# Altium PCB MAGIsDebugger.PcbDoc (part 1 of 2)
Units mil, origin at the board's own origin, x right, y up, seen from the top; angles counter-clockwise.
Board outline 6000 x 4000 mil, 2 copper layers (Top Layer, Bottom Layer); 31 components, 29 nets, 170 pads, 25 vias.
Unrouted connection lines stored in the file: 4.
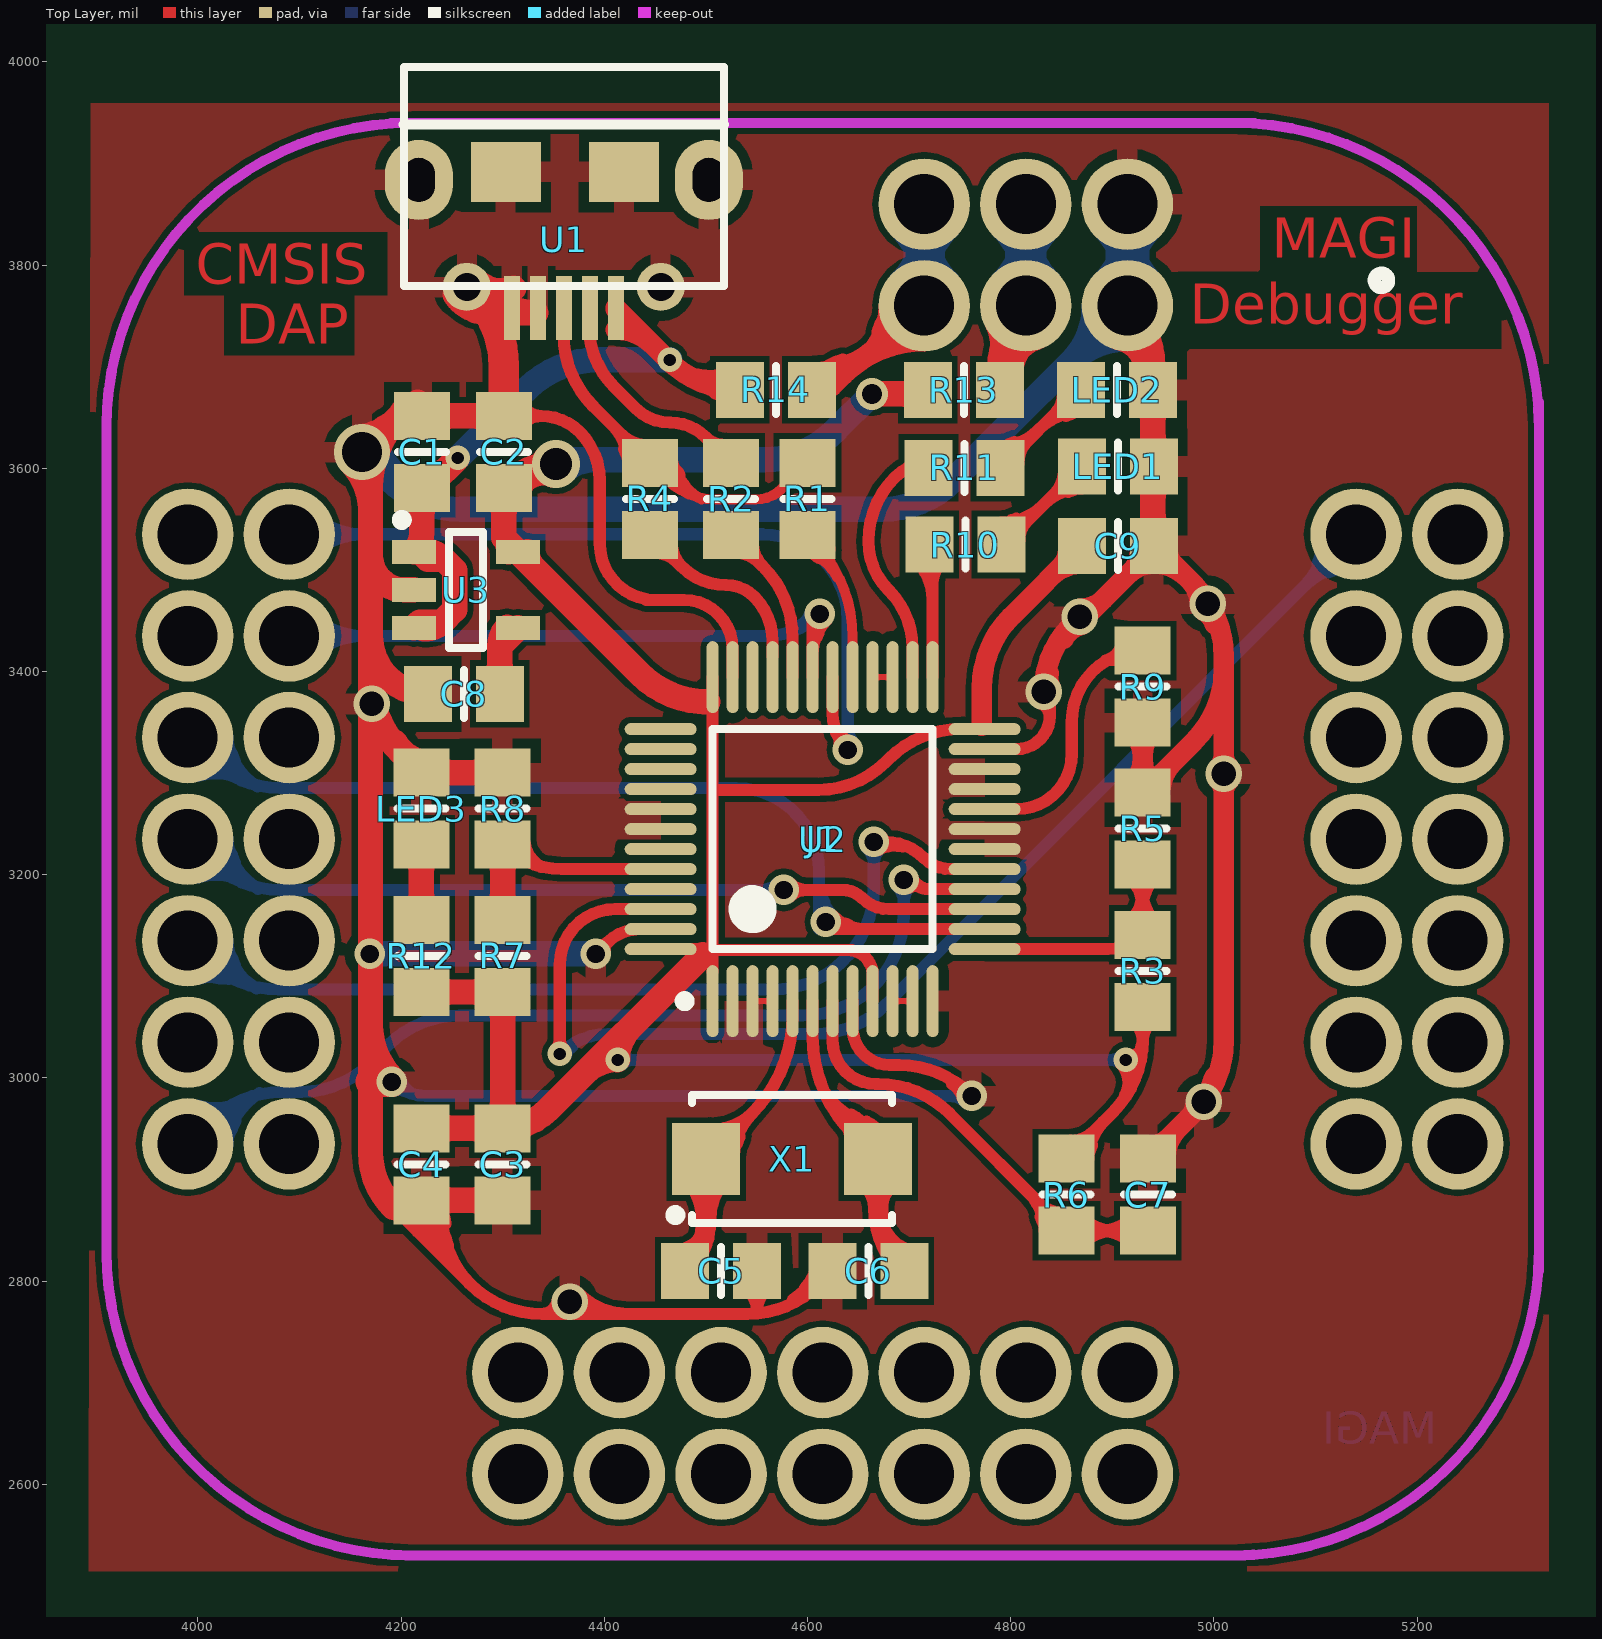
[diagram p0: Top Layer view]
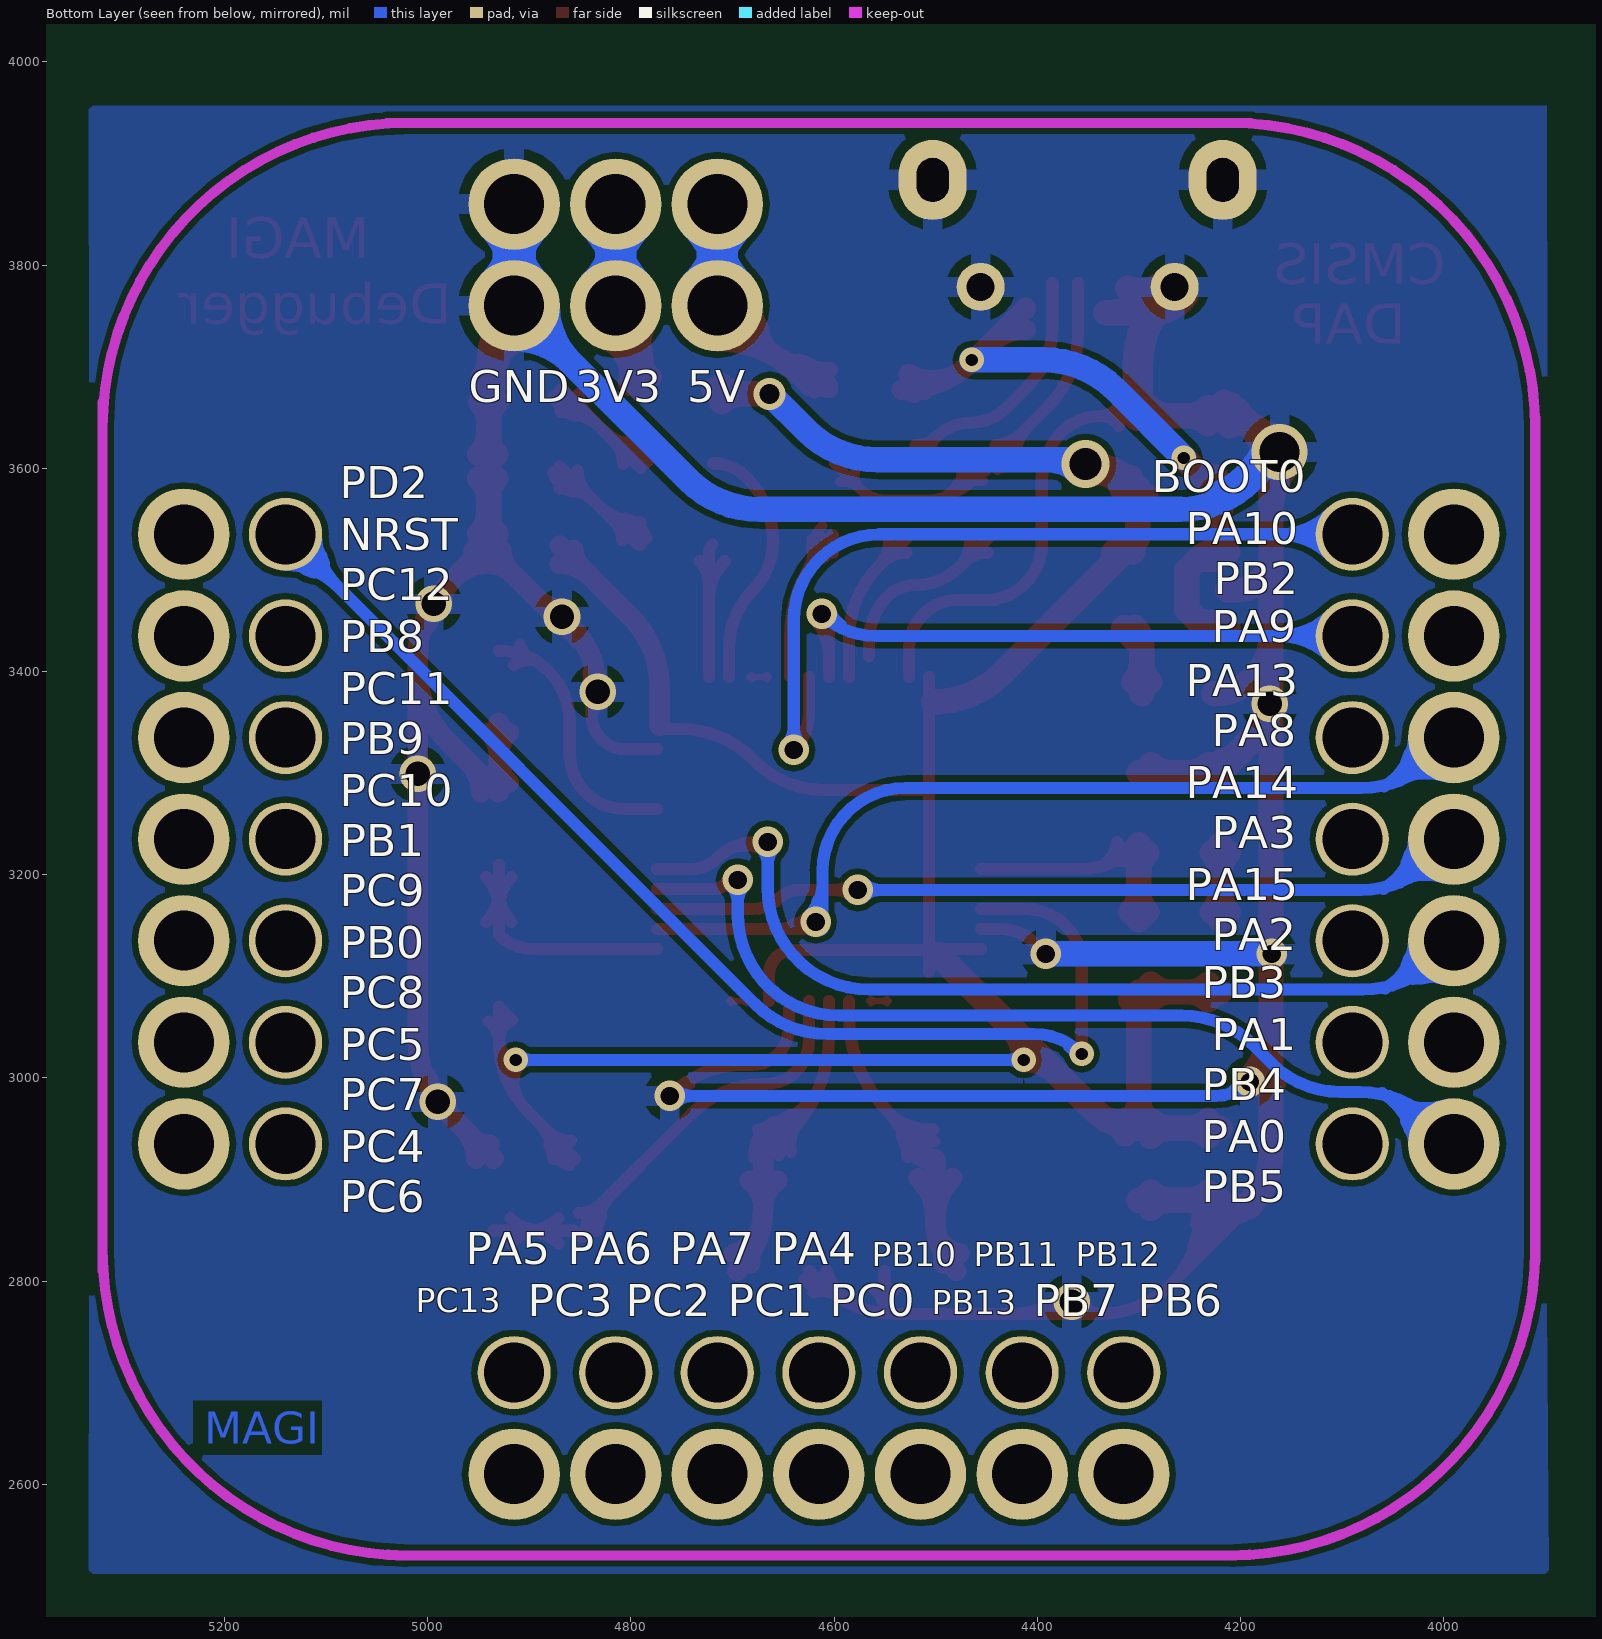
[diagram p1: Bottom Layer view, seen from below]

## Layer stack, top to bottom
Top Solder: solder mask 0.4, Solder Resist, Dk 3.5
Top Layer: signal copper 1.4
Dielectric 1: dielectric 12.6, FR-4, Dk 4.8
Bottom Layer: signal copper 1.4
Bottom Solder: solder mask 0.4, Solder Resist, Dk 3.5

## Board outline
1000,1000 7000,1000 7000,5000 1000,5000

## Design rules (kind name [scope] priority, off if disabled: settings)
Clearance [All] p1: gap=6
ComponentClearance [InNet('No Net') vs InNet('3.3V')] p1: gap=10 collisioncheckmode=3 verticalgap=10 showdistances=FALSE
PolygonConnect [All] p1: connectstyle=Relief reliefconductorwidth=20 reliefentries=4 polygonreliefangle="90 Angle" airgapwidth=10
RoutingVias [All] p1: holewidth=28 width=50 viastyle="Through Hole" minholewidth=12 minwidth=24 maxholewidth=280 maxwidth=500
SolderMaskExpansion [All] p1: expansion=4
Width [All] p1: maxlimit=100 minlimit=6 preferedwidth=10
28 further rules are at their usual default settings.

## Components (designator, comment, footprint, x,y, rotation, side; value= is the part's Value field where it differs from the comment)
C1 "10uf" 6-0805_n 4220.47,3616.14 r90 top
C2 "10uf" 6-0805_n 4301.18,3616.14 r90 top
C3 "10uf" 6-0805_n 4300,2915 r270 top
C4 "10uf" 6-0805_N 4220,2915 r270 top
C5 "15PF" 6-0805_n 4515,2810 r180 top
C6 "15PF" 6-0805_n 4660,2810 r0 top
C7 "104" 6-0805_n 4935,2885 r270 top
C8 "10uf" 6-0805_n 4261.81,3377.95 r180 top
C9 "10uf" 6-0805_N 4905.51,3523.62 r0 top
J1 "MAGIsBoard-Python" MAGIsBoard-Python 4615,3235 r0 top
LED1 "LED_3" 6-0805_n 4905.51,3601.77 r0 top
LED2 "LED_3" 6-0805_n 4904.65,3677.17 r0 top
LED3 "LED_3" 6-0805_n 4220,3265 r90 top
R1 "10K" 6-0805_n 4600,3570 r270 top
R2 "10K" 6-0805_n 4525,3570 r270 top
R3 "10K" 6-0805_n 4930,3105.43 r270 top
R4 "10K" 6-0805_n 4445,3570 r270 top
R5 "10K" 6-0805_n 4930,3245.43 r270 top
R6 "10K" 6-0805_n 4855,2885 r90 top
R7 "10K" 6-0805_n 4300,3120 r270 top
R8 "10K" 6-0805_n 4300,3265 r270 top
R9 "10K" 6-0805_n 4930,3385 r90 top
R10 "RES1_1" 6-0805_n 4755.43,3525 r180 top
R11 "RES1_1" 6-0805_n 4754.57,3600.39 r180 top
R12 "RES1_1" 6-0805_n 4220,3120 r270 top
R13 "0" 6-0805_n 4753.94,3677.17 r0 top
R14 "0" 6-0805_n 4568.9,3677.17 r0 top
U1 "USB" MicroUSB-B 4360.24,3850.39 r0 top
U2 "STM32F103CBT6" LQFP48_N 4615,3235 r90 top
U3 "RT9193" RT9193 4263.78,3480.32 r0 top
X1 "8M" 5032 4595,2920 r270 top

## Footprints (in the part's own frame and the unit in brackets; to place one, negate y for a bottom-side part, rotate by r counter-clockwise, add the part's x,y. Pads: shape width x height; smd on the part's side, far side on the other; paste and mask are expansions set on the pad)
6-0805_n [mm] "Chip Resistor, Body 2.0x1.2mm, IPC Medium Density"
  rect 1.2x1.4 smd: 1(-0.9,0) 2(0.9,0)
  silkscreen extent 0,-0.6 0,0.6, body extent -1.07,-0.7 1.07,0.7, height 0.7
6-0805_N [mm] "Chip Resistor, Body 2.0x1.2mm, IPC Medium Density"
  rect 1.2x1.4 smd: 1(-0.9,0) 2(0.9,0)
  silkscreen extent 0,-0.6 0,0.6, body extent -1.07,-0.7 1.07,0.7, height 0.7
5032 [mm]
  rect 1.8x1.7 smd: 1(0,-2.404) 2(0,1.896)
  silkscreen extent -1.6,-3.3 1.6,2.25
LQFP48_N [mm] "Thin QFP, 48-Leads, Body 7x7mm, Pitch 0.5mm, IPC Medium Density"
  oval 1.8x0.3 smd: 1(-4.05,2.75) 2(-4.05,2.25) 3(-4.05,1.75) 4(-4.05,1.25) 5(-4.05,0.75) 6(-4.05,0.25) 7(-4.05,-0.25) 8(-4.05,-0.75) 9(-4.05,-1.25) 10(-4.05,-1.75) 11(-4.05,-2.25) 12(-4.05,-2.75) 25(4.05,-2.75) 26(4.05,-2.25) 27(4.05,-1.75) 28(4.05,-1.25) 29(4.05,-0.75) 30(4.05,-0.25) 31(4.05,0.25) 32(4.05,0.75) 33(4.05,1.25) 34(4.05,1.75) 35(4.05,2.25) 36(4.05,2.75)
  oval 0.3x1.8 smd: 13(-2.75,-4.05) 14(-2.25,-4.05) 15(-1.75,-4.05) 16(-1.25,-4.05) 17(-0.75,-4.05) 18(-0.25,-4.05) 19(0.25,-4.05) 20(0.75,-4.05) 21(1.25,-4.05) 22(1.75,-4.05) 23(2.25,-4.05) 24(2.75,-4.05) 37(2.75,4.05) 38(2.25,4.05) 39(1.75,4.05) 40(1.25,4.05) 41(0.75,4.05) 42(0.25,4.05) 43(-0.25,4.05) 44(-0.75,4.05) 45(-1.25,4.05) 46(-1.75,4.05) 47(-2.25,4.05) 48(-2.75,4.05)
  silkscreen extent -4.17,-2.75 2.75,3.57, body extent -3.5,-3.5 3.5,3.5, height 1.6
MAGIsBoard-Python [mil]
  round 90 hole 59.06: 1(300,525) 1(300,625) 2(200,525) 2(200,625) 3(100,525) 3(100,625) 29(-625,300) 30(-625,200) 31(-625,100) 32(-625,0) 33(-625,-100) 34(-625,-200) 35(-625,-300) 36(-300,-625) 37(-200,-625) 38(-100,-625) 39(0,-625) 40(100,-625) 41(200,-625) 42(300,-625) 43(625,-300) 44(625,-200) 45(625,-100) 46(625,0) 47(625,100) 48(625,200) 49(625,300)
  round 90 / inner round 72 / far side round 72 hole 59.06: 8(-525,300) 9(-525,200) 10(-525,100) 11(-525,0) 12(-525,-100) 13(-525,-200) 14(-525,-300) 15(-300,-525) 16(-200,-525) 17(-100,-525) 18(0,-525) 19(100,-525) 20(200,-525) 21(300,-525) 22(525,-300) 23(525,-200) 24(525,-100) 25(525,0) 26(525,100) 27(525,200) 28(525,300)
  Keep-Out Layer lines w10: -705,-415 -705,415 ; -705,-405 ccw(c-405,-405) -405,-705 ; -705,405 cw(c-405,405) -405,705 ; -425,705 425,705 ; -410,-705 415,-705 ; 405,-705 ccw(c405,-405) 705,-405 ; 405,705 cw(c405,405) 705,405 ; 705,-425 705,430
  silkscreen extent 543,543 557,557
MicroUSB-B [mm]
  oval 1.7x2 hole 0.8 slot 1.1 at 90 deg: 0(-3.625,0.85) 0(3.625,0.85)
  oval 1.7x2 on Top Paste: 0(-3.625,0.85) 0(3.625,0.85)
  round 1.2 hole 0.7: 0(-2.425,-1.825) 0(2.425,-1.825)
  round 1.2 on Top Paste: 0(-2.425,-1.825) 0(2.425,-1.825)
  rect 1.75x1.5 smd: 0(-1.45,1.05) 0(1.5,1.05)
  rect 0.4x1.6 smd: 1(1.3,-2.35) 2(0.65,-2.35) 3(0,-2.35) 4(-0.65,-2.35) 5(-1.3,-2.35)
  silkscreen extent -4,-1.8 4,3.67, body extent -4.1,-1.93 4.1,3.77, height 3
RT9193 [mm]
  rect 1.1x0.6 smd: 1(-1.3,0.95) 2(-1.3,0) 3(-1.3,-0.95) 4(1.3,-0.95) 5(1.3,0.95)
  silkscreen extent -1.72,-1.45 0.43,1.87

## Part data
C1 C2 C3 C4 C8 C9: library part "CAPACITOR POL", "Capacitor"
C5 C6 C7: library part CAP
R1 R2 R3 R4 R5 R6 R7 R8 R9 R13 R14: library part RES
U2: "STM32 ARM-based 32-bit MCU with 128 Kbytes Flash, 48-pin LQFP, Industrial Temperature"
X1: library part CRYSTAL

## Via types
v1: diameter 30, hole 18, Top Layer to Bottom Layer, tented both sides, 10 vias
v2: diameter 36, hole 24, Top Layer to Bottom Layer, tented both sides, 7 vias
v3: diameter 24, hole 12, Top Layer to Bottom Layer, tented both sides, 5 vias
v4: diameter 47.24, hole 31.5, Top Layer to Bottom Layer, tented both sides, 1 vias
v5: diameter 55.12, hole 39.37, Top Layer to Bottom Layer, tented both sides, 1 vias
v6: diameter 31.5, hole 19.68, Top Layer to Bottom Layer, tented both sides, 1 vias

## Nets (pads, with @x,y where several pads share a name; then routed paths per layer and width w, separated by ;. In a path a pad name is that pad's centre, name@x,y a point inside that pad or via, vN(x,y) a via of type N, cw(c..) or ccw(c..) an arc to the next point about the centre after c; other vN are vias at no path point)
3.3V: C2.1 C3.1 C4.1 C9.1 R3.2 R6.2 R7.2 R12.2 R13.1 U2.1 U2.9 U2.24 U2.36 U2.48 U3.5 | length 5162.2
  Top Layer w12: U2.48@4455.55,3126.73 4506.73,3126.73 ; U2.1@4506.73,3104.33 4506.73,3125.98 4507.48,3125.98 ; U2.36@4506.73,3394.45 4506.73,3283.46 ; U2.9@4664.21,3075.55 4664.21,3101.54 ccw(c4639.76,3101.54) 4639.76,3125.98 4507.48,3125.98 ; U2.24@4774.45,3343.27 4750.83,3343.27 ccw(c4750.83,3243.27) 4680.12,3313.98 4677.17,3311.02 cw(c4610.63,3377.56) 4610.63,3283.46 4506.73,3283.46 ; R6.2@4855,2920.43 4900.71,2966.14 ccw(c4830,3036.85) 4930,3036.85 ; R6.2@4860.67,2914.3 ccw(c4853,2941.42) R6.2@4880.23,2934.12 ; v3@4915.61,3023.29 ccw(c4919.59,3033.24) 4927.93,3026.51 ; R3.2@4916.85,3056.85 R3.2@4930,3070 4930,3036.85 ; 4506.73,3126.73 ccw(c4507.48,3126.73) 4507.48,3125.98 ; 4506.73,3126.73 4506.73,3283.46 ; 4930,3036.86 cw(c4952.36,3036.86) 4939.85,3055.39 ccw(c4952.36,3036.86) 4930,3036.86 ; 4930,3036.86 ccw(c4907.64,3036.86) 4920.15,3055.39 cw(c4907.64,3036.86) 4930,3036.86 ; R6.2@4858.94,2938.06 ccw(c4858.94,2971.09) 4882.3,2947.73 cw(c4858.94,2971.09) R6.2@4858.94,2938.06 ; R6.2@4876.56,2920.43 cw(c4928.61,2920.43) 4891.8,2957.24 ccw(c4928.61,2920.43) R6.2@4876.56,2920.43 ; v3@4908.97,3013.65 cw(c4889.54,2995.77) 4912.78,2983.23 ccw(c4889.54,2995.77) v3@4908.97,3013.65 ; v3@4915.35,3012.05 ccw(c4908.77,3031) 4928.6,3027.9 cw(c4908.77,3031) v3@4915.35,3012.05 ; v3@4916.92,3012.87 ccw(c4898.4,3038.27) 4929.46,3033.41 cw(c4898.4,3038.27) v3@4916.92,3012.87 ; v3@4917.8,3021.78 cw(c4902.64,3007.83) 4920.77,2998.05 ccw(c4902.64,3007.83) v3@4917.8,3021.78
  Top Layer w20: U2.24@4771.65,3346.46 4771.65,3383.78 cw(c4871.65,3383.78) 4800.94,3454.49 C9.1@4870.08,3523.62 ; 4840.1,3493.65 cw(c4870.08,3463.67) 4870.08,3506.06 ccw(c4870.08,3463.67) 4840.1,3493.65 ; C9.1@4849.61,3503.15 ccw(c4833.08,3519.69) 4856.46,3519.69 cw(c4833.08,3519.69) C9.1@4849.61,3503.15
  Top Layer w25: C4.1@4220,2950.43 C3.1@4300,2950.43 ; R12.2@4220,3084.57 R7.2@4300,3084.57 C3.1@4300,2950.43 ; C2.1@4308.4,3591.34 ccw(c4316.95,3619.01) v4@4331.43,3593.93 ; C2.1@4315.94,3578.13 cw(c4340.32,3572.31) v4@4340.32,3597.38 ; C2.1@4316.82,3590.01 ccw(c4305.78,3631.22) v4@4342.73,3609.89 ; C2.1@4319.84,3587.42 cw(c4339.3,3567.96) v4@4348.6,3593.86 ; C2.1@4321.77,3592.41 ccw(c4313.38,3623.72) v4@4342.4,3609.28 ; v4@4334.39,3601.98 ccw(c4354.28,3567.54) C2.1@4315.86,3577.83 ; v4(4352.36,3604.33) ccw(c4352.36,3537.8) 4305.32,3584.84 C2.1@4301.18,3580.71 4301.18,3531.5 ; 4497.05,3121.06 4345.1,2969.11 cw(c4300,3014.21) C3.1@4300,2950.43 ; U2.36@4502.01,3370.08 cw(c4502.01,3465.23) 4493.73,3370.44 cw(c4502.01,3465.23) 4434.73,3397.95 U3.5@4314.96,3517.72 4301.18,3531.5 ; v6(4663.39,3673.23) 4709,3673.23 ccw(c4709,3686.67) R13.1@4718.5,3677.17 ; 4250.79,2950.43 cw(c4250.79,2977.28) 4231.8,2958.3 ccw(c4250.79,2977.28) 4250.79,2950.43 ; 4250.79,2950.43 ccw(c4250.79,2923.58) 4231.8,2942.57 cw(c4250.79,2923.58) 4250.79,2950.43 ; 4250.79,3084.57 cw(c4250.79,3111.42) 4231.8,3092.43 ccw(c4250.79,3111.42) 4250.79,3084.57 ; 4250.79,3084.57 ccw(c4250.79,3057.72) 4231.8,3076.7 cw(c4250.79,3057.72) 4250.79,3084.57 ; 4269.21,2950.43 cw(c4269.21,2923.58) 4288.2,2942.57 ccw(c4269.21,2923.58) 4269.21,2950.43 ; 4269.21,2950.43 ccw(c4269.21,2977.28) 4288.2,2958.3 cw(c4269.21,2977.28) 4269.21,2950.43 ; 4269.21,3084.57 cw(c4269.21,3057.72) 4288.2,3076.7 ccw(c4269.21,3057.72) 4269.21,3084.57 ; 4269.21,3084.57 ccw(c4269.21,3111.42) 4288.2,3092.43 cw(c4269.21,3111.42) 4269.21,3084.57 ; 4300,2977.28 cw(c4273.15,2977.28) 4292.14,2958.3 ccw(c4273.15,2977.28) 4300,2977.28 ; 4300,2977.28 ccw(c4326.85,2977.28) 4307.86,2958.3 cw(c4326.85,2977.28) 4300,2977.28 ; 4300,3057.72 cw(c4326.85,3057.72) 4307.86,3076.7 ccw(c4326.85,3057.72) 4300,3057.72 ; 4300,3057.72 ccw(c4273.15,3057.72) 4292.14,3076.7 cw(c4273.15,3057.72) 4300,3057.72 ; 4301.18,3531.5 cw(c4289.63,3519.94) 4305.8,3517.62 ccw(c4289.63,3519.94) 4301.18,3531.5 ; 4301.18,3553.86 cw(c4328.03,3553.86) 4309.05,3572.84 ccw(c4328.03,3553.86) 4301.18,3553.86 ; 4301.18,3553.86 ccw(c4274.33,3553.86) 4293.32,3572.84 cw(c4274.33,3553.86) 4301.18,3553.86 ; C2.1@4315.86,3577.83 cw(c4353.28,3567.8) 4333.91,3601.35 ccw(c4353.28,3567.8) C2.1@4315.86,3577.83 ; C2.1@4319.73,3587.17 cw(c4339.53,3567.38) v4@4348.71,3593.82 ; C2.1@4319.73,3587.17 cw(c4339.53,3567.38) v4@4348.71,3593.82 ; C2.1@4319.73,3587.17 cw(c4339.53,3567.38) v4@4348.71,3593.82 ; C2.1@4326.43,3597.38 cw(c4333.38,3571.45) 4346.8,3594.7 ccw(c4333.38,3571.45) C2.1@4326.43,3597.38 ; C2.1@4326.43,3597.38 ccw(c4319.48,3623.32) v4@4342.73,3609.89 ; C2.1@4326.43,3597.38 ccw(c4319.48,3623.32) v4@4342.73,3609.89 ; 4691.65,3673.23 cw(c4691.65,3646.38) 4710.64,3665.36 ccw(c4691.65,3646.38) 4691.65,3673.23 ; 4691.65,3673.23 ccw(c4691.65,3700.08) 4710.64,3681.09 cw(c4691.65,3700.08) 4691.65,3673.23 ; C3.1@4309.5,2960.06 ccw(c4321.18,2980.31) 4327.23,2957.73 cw(c4321.18,2980.31) C3.1@4309.5,2960.06 ; C3.1@4313.57,2944.87 cw(c4339.84,2929.71) 4331.99,2959 ccw(c4339.84,2929.71) C3.1@4313.57,2944.87 ; U3.5@4324.11,3517.72 ccw(c4346.21,3517.72) 4330.59,3502.09 cw(c4346.21,3517.72) U3.5@4324.11,3517.72 ; 4380.63,3004.65 cw(c4413.39,2971.9) 4413.39,3018.22 ccw(c4413.39,2971.9) 4380.63,3004.65 ; v3@4412.89,3017.72 cw(c4459.2,3017.72) 4426.45,3050.47 ccw(c4459.2,3017.72) v3@4412.89,3017.72
  Bottom Layer w12: v3(4413.39,3017.72) v3(4913.39,3017.72) ; 4427.87,3017.72 cw(c4427.87,3032.2) 4417.63,3021.96 ccw(c4427.87,3032.2) 4427.87,3017.72 ; 4427.87,3017.72 ccw(c4427.87,3003.23) 4417.63,3013.47 cw(c4427.87,3003.23) 4427.87,3017.72 ; 4898.9,3017.72 cw(c4898.9,3003.23) 4909.14,3013.47 ccw(c4898.9,3003.23) 4898.9,3017.72 ; 4898.9,3017.72 ccw(c4898.9,3032.2) 4909.14,3021.96 cw(c4898.9,3032.2) 4898.9,3017.72
  Bottom Layer w25: v4@4362.2,3608.27 4557,3608.27 ccw(c4557,3708.27) 4627.71,3637.56 v6(4663.39,3673.23) ; v4@4360.23,3596.47 cw(c4388.72,3567.98) 4388.72,3608.27 ccw(c4388.72,3567.98) v4@4360.23,3596.47
5V: C1.1 R14.1 U1.1 U3.1 U3.3 | length 1223.2
  Top Layer w20: U1.1@4411.42,3757.87 4462.89,3706.4 ccw(c4533.46,3776.97) R14.1@4533.46,3677.17 R14.1@4511.18,3677.17 ; U1.1@4411.42,3736.38 cw(c4411.42,3684.48) 4448.11,3721.18 ccw(c4411.42,3684.48) U1.1@4411.42,3736.38 ; U1.1@4411.42,3756.38 cw(c4411.42,3752.77) 4413.97,3755.32 ccw(c4411.42,3752.77) U1.1@4411.42,3756.38 ; 4491.85,3688.32 ccw(c4503.72,3732.62) 4526.65,3692.9 cw(c4503.72,3732.62) 4491.85,3688.32 ; 4509.58,3683.56 cw(c4504.43,3664.34) 4521.67,3674.29 ccw(c4504.43,3664.34) 4509.58,3683.56
  Top Layer w25: U3.3@4212.6,3442.91 4218.39,3448.71 4240.62,3448.71 ; v3@4255.12,3609.45 4230.55,3584.88 cw(c4220.47,3594.97) C1.1@4220.47,3580.71 4220.47,3536.73 cw(c4193.59,3536.73) U3.1@4212.6,3517.72 4219.04,3517.72 4226.13,3510.63 4241.91,3510.63 ; 4220.47,3553.86 cw(c4247.32,3553.86) 4228.34,3572.84 ccw(c4247.32,3553.86) 4220.47,3553.86 ; 4220.47,3553.86 ccw(c4193.62,3553.86) 4212.61,3572.84 cw(c4193.62,3553.86) 4220.47,3553.86 ; 4240.62,3448.71 cw(c4224.69,3464.64) 4222.37,3442.23 ccw(c4224.69,3464.64) 4240.62,3448.71 ; 4240.62,3448.71 4252.75,3460.84 4252.75,3499.79 4241.91,3510.63 ; 4241.91,3510.63 ccw(c4223.11,3491.83) 4222.42,3518.41 cw(c4223.11,3491.83) 4241.91,3510.63 ; U3.3@4221.95,3443.4 cw(c4234.77,3430.59) 4234.77,3448.71 ccw(c4234.77,3430.59) U3.3@4221.95,3443.4 ; U3.1@4221.95,3517.23 ccw(c4237.9,3533.17) 4237.9,3510.63 cw(c4237.9,3533.17) U3.1@4221.95,3517.23 ; U3.3@4222.44,3442.22 ccw(c4222.44,3470.46) 4242.4,3450.49 cw(c4222.44,3470.46) U3.3@4222.44,3442.22 ; U3.1@4222.44,3518.41 cw(c4222.44,3490.17) 4242.4,3510.14 ccw(c4222.44,3490.17) U3.1@4222.44,3518.41 ; C1.1@4224.41,3591.83 ccw(c4224.41,3623.43) 4246.76,3601.09 cw(c4224.41,3623.43) C1.1@4224.41,3591.83
  Bottom Layer w25: v3(4255.91,3610.24) 4323.07,3677.4 cw(c4393.78,3606.69) 4393.78,3706.69 v3(4464.57,3706.69)
BOOT0: R7.1 R8.2 U2.44 | length 550.7
  Top Layer w12: R8.2@4300,3229.57 ccw(c4358.17,3287.74) 4358.17,3205.47 U2.44@4455.55,3205.47 ; R8.2@4305.63,3224.21 cw(c4311.5,3205.62) 4329.41,3213.29 ; R8.2@4308.5,3212.55 cw(c4317.77,3177.94) 4335.68,3208.97 ccw(c4317.77,3177.94) R8.2@4308.5,3212.55 ; R8.2@4321.38,3232.07 ccw(c4354.68,3236.84) 4337.86,3207.71 cw(c4354.68,3236.84) R8.2@4321.38,3232.07
  Top Layer w25: R7.1@4300,3155.43 R8.2@4300,3229.57 ; 4300,3182.28 cw(c4273.15,3182.28) 4292.14,3163.3 ccw(c4273.15,3182.28) 4300,3182.28 ; 4300,3182.28 ccw(c4326.85,3182.28) 4307.86,3163.3 cw(c4326.85,3182.28) 4300,3182.28 ; 4300,3202.72 cw(c4326.85,3202.72) 4307.86,3221.7 ccw(c4326.85,3202.72) 4300,3202.72 ; 4300,3202.72 ccw(c4273.15,3202.72) 4292.14,3221.7 cw(c4273.15,3202.72) 4300,3202.72
BOOT1: R9.2 U2.20 | length 350.4
  Top Layer w12: U2.20@4774.45,3264.53 4805.87,3264.53 ccw(c4805.87,3318.9) 4860.24,3318.9 4860.24,3350.67 cw(c4930,3350.67) R9.2@4930,3420.43 ; 4893.41,3410.63 cw(c4900.05,3385.86) 4915.47,3406.35 ccw(c4900.05,3385.86) 4893.41,3410.63 ; 4893.41,3410.63 ccw(c4887.5,3432.69) 4909.27,3425.77 cw(c4887.5,3432.69) 4893.41,3410.63